# Altium PCB 2.pcbdoc
Units mm, origin at the board's own origin, x right, y up, seen from the top; angles counter-clockwise.
Board outline 84.15 x 1169.65 mm, 2 copper layers (Top Layer, Bottom Layer); 28 components, 38 nets, 175 pads, 0 vias.
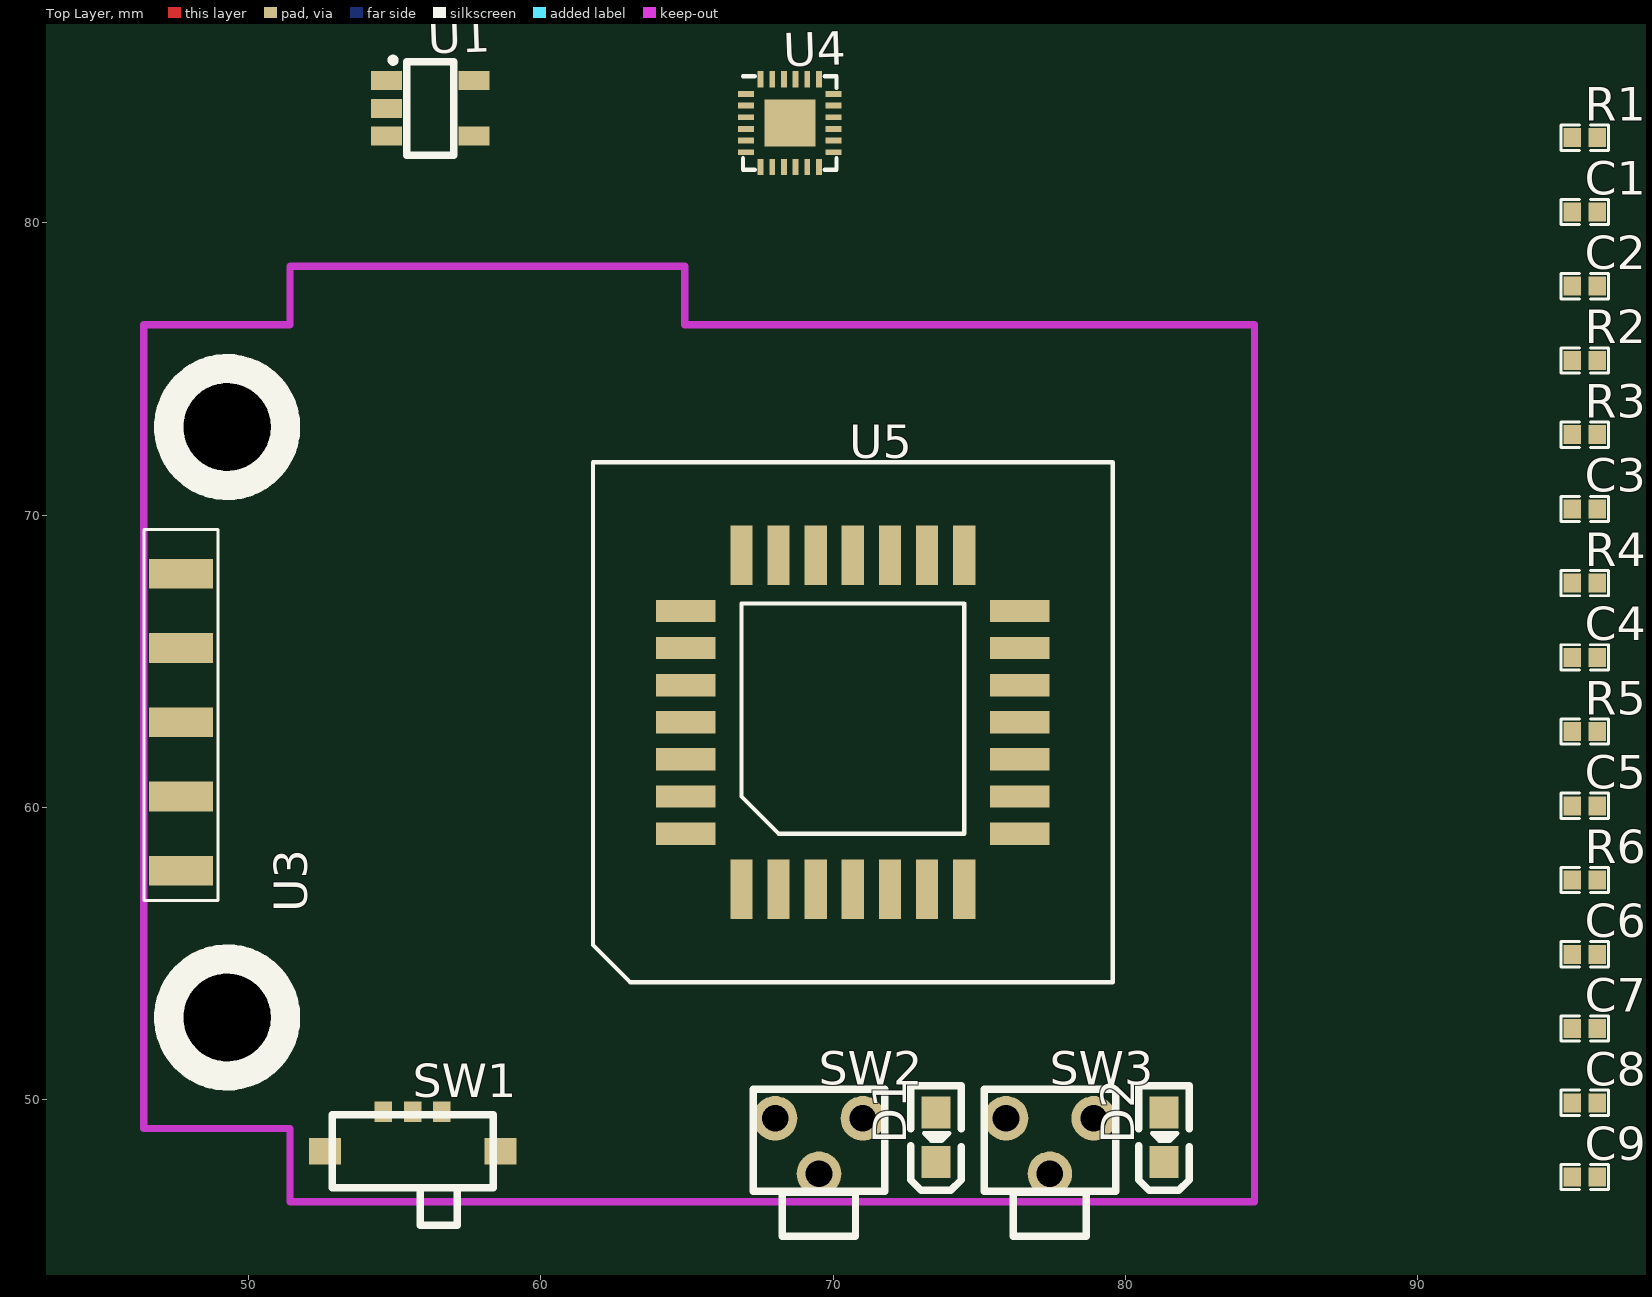
[diagram p0: Top Layer view]
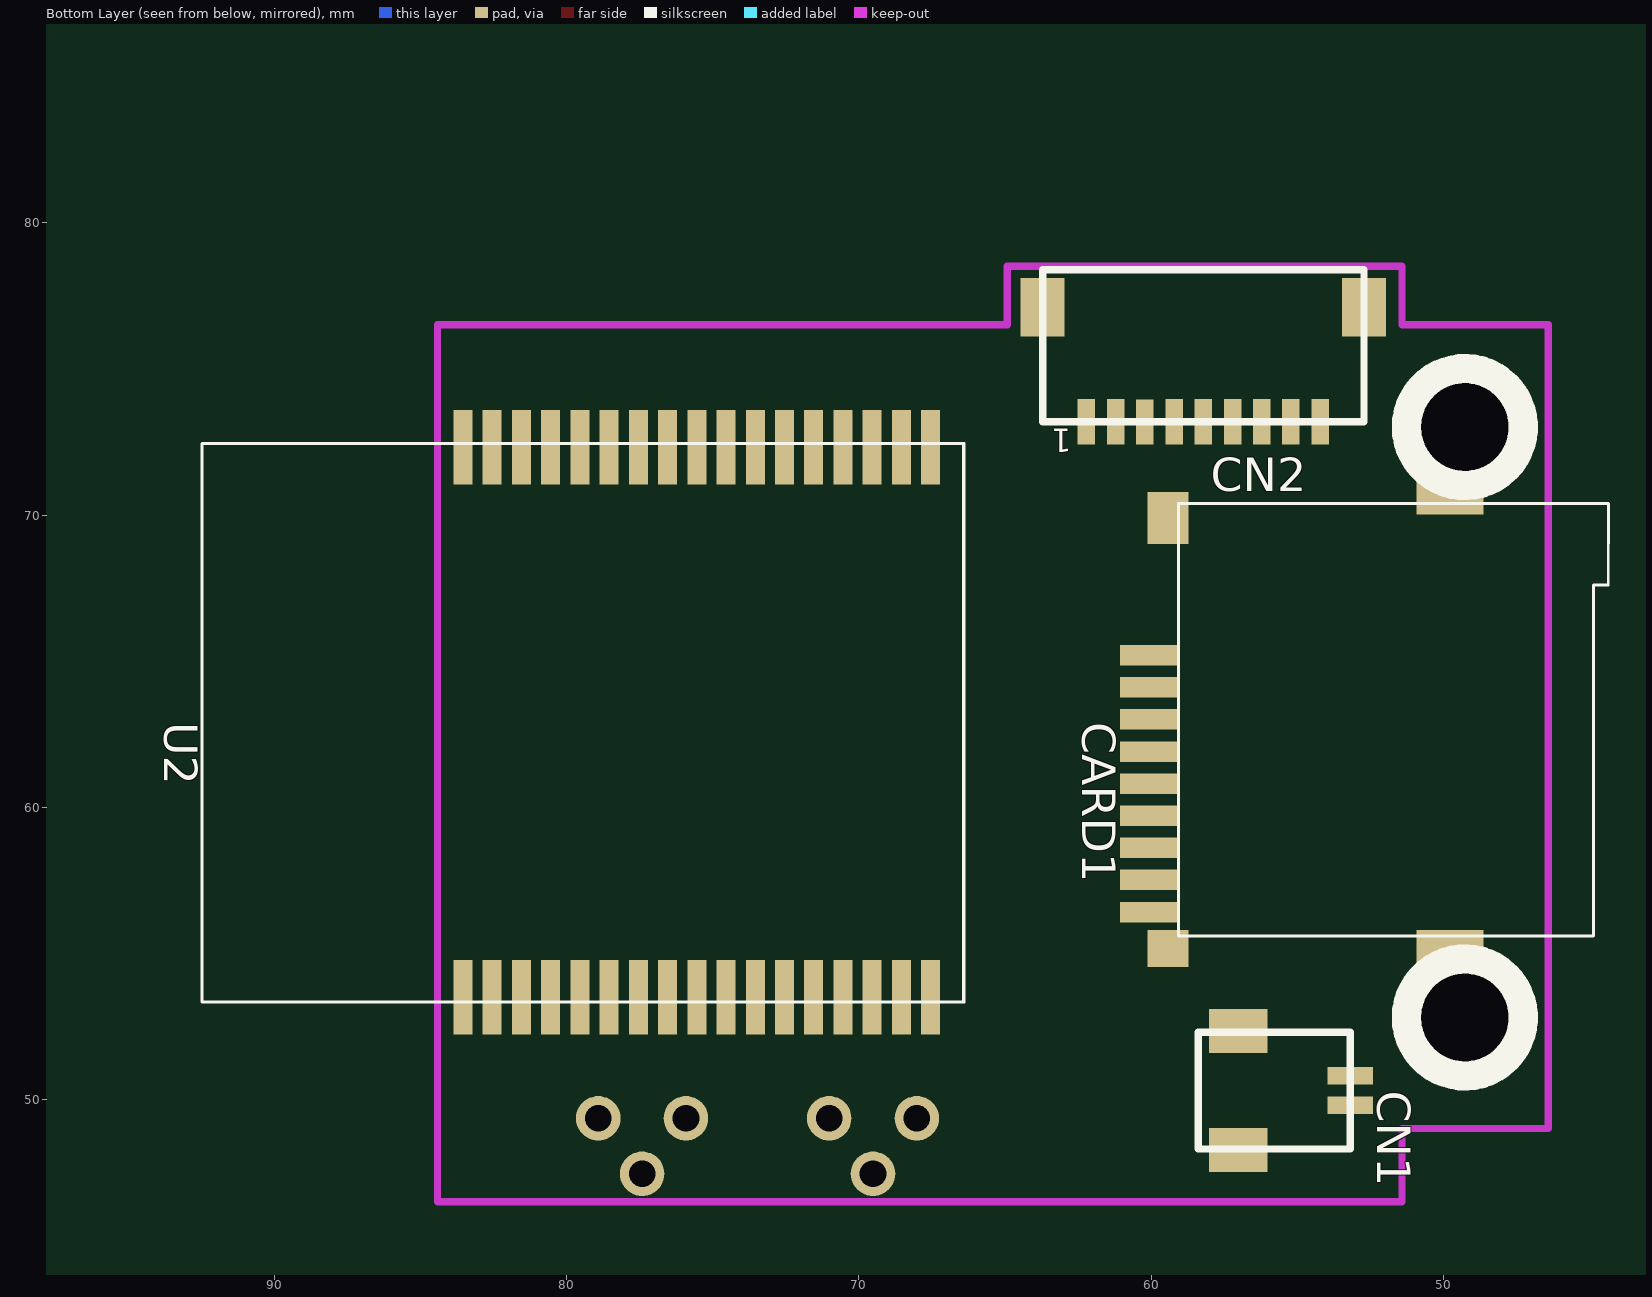
[diagram p1: Bottom Layer view, seen from below]

## Layer stack, top to bottom
Top Layer: signal copper (thickness not stored)
Dielectric: dielectric 0.32, FR-4, Dk 4.8
Bottom Layer: signal copper (thickness not stored)

## Board outline
109.551,25.4 25.4,25.4 25.4,1195.049 109.551,1195.049

## Components (designator, comment, footprint, x,y, rotation, side; value= is the part's Value field where it differs from the comment)
C1 "10uF" 0402 95.716,80.369 r0 top
C2 "10uF" 0402 95.716,77.829 r0 top
C3 "100nF" 0402 95.716,70.209 r0 top
C4 "100nF" 0402 95.716,65.129 r0 top
C5 "10uF" 0402 95.716,60.049 r0 top
C6 "100nF" 0402 95.716,54.969 r0 top
C7 "10nF" 0402 95.716,52.429 r0 top
C8 "100nF" 0402 95.716,49.889 r0 top
C9 "100nF" 0402 95.716,47.349 r0 top
CARD1 "HYC77-TF09-200" TF-015 54.916,62.909 r270 bottom
CN1 "A1002WV-S-2P" A1002WR-S-2P_LEO 55.116,50.309 r90 bottom
CN2 "A1002WR-S-9P" A1002WR-S-9P_LEO 58.216,75.109 r180 bottom
D1 "RED" LED-0603 73.516,48.709 r90 top
D2 "GREEN" LED-0603 81.316,48.709 r90 top
R1 "1K" 0402 95.716,82.909 r0 top
R2 "200" 0402 95.716,75.289 r0 top
R3 "10K" 0402 95.716,72.749 r0 top
R4 "10K" 0402 95.716,67.669 r0 top
R5 "10K" 0402 95.716,62.589 r0 top
R6 "10K" 0402 95.716,57.509 r0 top
SW1 "SSAJ120100" SW-SMD-5.5X2.5 55.616,48.909 r0 top
SW2 "KAN4562-0501C" KAN4562-0501C 69.516,48.409 r0 top
SW3 "KAN4562-0501C" KAN4562-0501C 77.416,48.409 r0 top
U1 "SPX3819M5-L-3-3/TR" SOT-23-5 56.216,83.909 r0 top
U2 "DWM1001" DWM1001 79.416,62.909 r270 bottom
U3 "GPS_Header" GPS_HEADER_SMT_NEW 46.416,49.809 r90 top
U4 "MPU-9250" QFN-24-1EP_3X3MM_PITCH0.4MM 68.516,83.409 r0 top
U5 "MTi-1" PLCC-28 70.673,62.909 r0 top

## Footprints (in the part's own frame and the unit in brackets; to place one, negate y for a bottom-side part, rotate by r counter-clockwise, add the part's x,y. Pads: shape width x height; smd on the part's side, far side on the other; paste and mask are expansions set on the pad)
0402 [mm]
  rect 0.6x0.65 smd: 1(-0.424,0) 2(0.424,0)
  silkscreen extent -0.82,-0.43 0.81,0.43
A1002WR-S-2P_LEO [mm]
  rect 0.6x1.55 smd: 1(-0.502,-1.925) 2(0.498,-1.925)
  rect 1.5x2 smd: 3(-2.032,1.905) 4(2.032,1.905)
  silkscreen extent -2,-1.92 2,3.27
A1002WR-S-9P_LEO [mm]
  rect 0.6x1.55 smd: 1(-4,-1.923) 2(-3,-1.923) 3(-1.996,-1.925) 4(-1.001,-1.923) 5(0,-1.923) 6(1.001,-1.923) 7(1.999,-1.923) 8(2.998,-1.923) 9(4,-1.923)
  rect 1.5x2 smd: 10(-5.499,1.999) 11(5.5,1.999)
  silkscreen extent -5.5,-1.92 5.5,3.28
DWM1001 [mm]
  rect 2.54x0.65 smd: 1(9.406,-4.129) 2(9.406,-3.129) 3(9.406,-2.129) 4(9.406,-1.128) 5(9.406,-0.13) 6(9.406,0.871) 7(9.406,1.872) 8(9.406,2.87) 9(9.406,3.871) 10(9.406,4.872) 11(9.406,5.871) 12(9.406,6.871) 13(9.406,7.871) 14(9.406,8.872) 15(9.406,9.87) 16(9.406,10.871) 17(9.406,11.872) 18(-9.406,11.872) 19(-9.406,10.871) 20(-9.406,9.87) 21(-9.406,8.872) 22(-9.406,7.871) 23(-9.406,6.871) 24(-9.406,5.871) 25(-9.406,4.872) 26(-9.406,3.871) 27(-9.406,2.87) 28(-9.406,1.872) 29(-9.406,0.871) 30(-9.406,-0.13) 31(-9.406,-1.128) 32(-9.406,-2.129) 33(-9.406,-3.129) 34(-9.406,-4.129)
  silkscreen extent -9.54,-13.05 9.56,13.02
GPS_HEADER_SMT_NEW [mm]
  rect 1.02x2.2 smd: 1(18.18,-1.27) 2(15.64,-1.27) 3(13.1,-1.27) 4(10.56,-1.27) 5(8.02,-1.27)
  round 3 hole 3 unplated: ""(3,-2.85) ""(23.2,-2.85)
  silkscreen extent 1,-4.85 25.2,0
KAN4562-0501C [mil]
  round 60 hole 36: 0(0,-37.4) 1(-59.05,37.4) 2(59.07,37.4)
  silkscreen extent -89,-122 89,77
LED-0603 [mil]
  rect 43x39 smd: 1(33.51,0) 2(-33.5,0)
  silkscreen extent -72,-34 70,34
PLCC-28 [mil]
  rect 80x30 smd: 1(-225,0) 2(-225,-50) 3(-225,-100) 4(-225,-150) 12(225,-150) 13(225,-100) 14(225,-50) 15(225,0) 16(225,50) 17(225,100) 18(225,150) 26(-225,150) 27(-225,100) 28(-225,50)
  rect 30x80 smd: 5(-150,-225) 6(-100,-225) 7(-50,-225) 8(0,-225) 9(50,-225) 10(100,-225) 11(150,-225) 19(150,225) 20(100,225) 21(50,225) 22(0,225) 23(-50,225) 24(-100,225) 25(-150,225)
  silkscreen extent -350,-350 350,350
QFN-24-1EP_3X3MM_PITCH0.4MM [mm]
  rect 0.55x0.2 smd: 1(-1.5,1) 2(-1.5,0.6) 3(-1.5,0.2) 4(-1.5,-0.2) 5(-1.5,-0.6) 6(-1.5,-1) 13(1.5,-1) 14(1.5,-0.6) 15(1.5,-0.2) 16(1.5,0.2) 17(1.5,0.6) 18(1.5,1)
  rect 0.2x0.55 smd: 7(-1,-1.501) 8(-0.599,-1.501) 9(-0.201,-1.501) 10(0.2,-1.501) 11(0.599,-1.501) 12(1.001,-1.501) 19(1.001,1.501) 20(0.599,1.501) 21(0.2,1.501) 22(-0.201,1.501) 23(-0.599,1.501) 24(-1,1.501)
  rect 0.875x0.8 smd: 25(-0.435,-0.401) 25(-0.435,0.399) 25(0.436,-0.401) 25(0.436,0.399)
  silkscreen extent -1.6,-1.6 1.6,1.6
SOT-23-5 [mm]
  rect 1.06x0.65 smd: 1(-1.499,0.95) 2(-1.499,0) 3(-1.499,-0.95) 4(1.501,-0.95) 5(1.501,0.95)
  silkscreen extent -1.33,-1.6 0.8,1.71
SW-SMD-5.5X2.5 [mm]
  rect 0.6x0.7 smd: 1(-1.001,0.675) 2(1.001,0.675) C(0,0.675)
  rect 1.1x0.9 smd: 4(-3.001,-0.675) 5(3.001,-0.675)
  silkscreen extent -2.75,-3.22 2.75,0.57
TF-015 [mm]
  rect 0.7x2 smd: 1(-2.291,-5.145) 2(-1.191,-5.143) 3(-0.095,-5.145) 4(1.005,-5.145) 5(2.103,-5.145) 6(3.2,-5.145) 7(4.298,-5.145) 8(5.395,-5.145) 9(6.5,-5.145)
  rect 1.27x1.397 smd: 10(7.747,-4.506)
  rect 1.27x2.286 smd: 11(7.747,5.146) 12(-7.747,5.146)
  rect 1.778x1.397 smd: 13(-6.985,-4.506)
  silkscreen extent -7.49,-4.15 7.32,10.56

## Nets (pads, with @x,y where several pads share a name; then routed paths per layer and width w, separated by ;. In a path a pad name is that pad's centre, name@x,y a point inside that pad or via, vN(x,y) a via of type N, cw(c..) or ccw(c..) an arc to the next point about the centre after c; other vN are vias at no path point)
BUTTON_RST: SW2.1 U2.33
BUTTON_SDCARD: SW3.1 U2.32
CHARGE_VC: CN1.2 CN2.8 SW1.1
D2_1: D2.1 R2.1
FOOT_2: CN2.4 R6.1 U2.10
FOOT_5: CN2.5 R5.1 U2.9
FOOT_6: CN2.6 R4.1 U2.29
FOOT_7: CN2.7 R3.1 U2.28
GND: C1.1 C2.1 C3.1 C4.1 C5.1 C6.1 C7.1 C8.1 C9.2 CARD1.6 CN1.1 CN2.9 D1.2 SW2.2 SW3.2 U1.2 U2.1 U2.11 U2.24 U2.34 U3.2 U4.11 U4.18 U4.20 U5.4 U5.8 U5.13 U5.14 U5.25
GPS_1PPS: U2.19 U3.5
GPS_UART_RX: U2.18 U3.4
GPS_UART_TX: U2.20 U3.3
INT_IMUA: U2.4 U4.12
INT_IMUB: U2.5 U5.22
LED_R: D2.2 U2.16
R1_2: D1.1 R1.2
S$21: 
S$23: 
S$33: 
S$35: 
S$39: 
S$41: 
S$52: 
S$54: 
SDCARD_CLK: CARD1.5 U2.8
SDCARD_MISO: CARD1.7 U2.13
SDCARD_MOSI: CARD1.3 U2.7
SDCARD_NCS: CARD1.2 U2.6
SPI_CLK: U2.25 U4.23 U5.12
SPI_MISO: U2.27 U4.9 U5.11
SPI_MOSI: U2.26 U4.24 U5.10
SPI_NCS_MPU92: U2.23 U4.22
SPI_NCS_MTI: U2.17 U5.9
SWD_CLK: CN2.2 U2.2
SWD_DIO: CN2.3 U2.3
U4_10: C9.1 U4.10
VCC3.3: C2.2 C4.2 C5.2 C6.2 C7.2 C8.2 CARD1.4 CN2.1 R1.1 R2.2 R3.2 R4.2 R5.2 R6.2 U1.5 U2.12 U3.1 U4.1 U4.8 U4.13 U5.5 U5.7
VCC3.7: C1.2 C3.2 SW1.C U1.1 U1.3
pads on no net: CARD1.1 CARD1.8 CARD1.9 CARD1.10 CARD1.11 CARD1.12 CARD1.13 CN1.3 CN1.4 CN2.10 CN2.11 SW1.2 SW1.4 SW1.5 SW2.0 SW3.0 U1.4 U2.14 U2.15 U2.21 U2.22 U2.30 U2.31 U3. U4.2 U4.3 U4.4 U4.5 U4.6 U4.7 U4.14 U4.15 U4.16 U4.17 U4.19 U4.21 U4.25 U5.1 U5.2 U5.3 U5.6 U5.15 U5.16 U5.17 U5.18 U5.19 U5.20 U5.21 U5.23 U5.24 U5.26 U5.27 U5.28

## Text inside footprints (layer, text, board x,y; h text height)
CN2: Bottom Overlay "1" at 62.716,72.946 h0.8 r180
U3: Document "37.4" at 65.8,40.132 h2.03 r180; Document "26.2" at 40.132,60.209 h2.03 r90